# EAGLE board TEF6686_radio_rev2 (EAGLE 7.2.0)
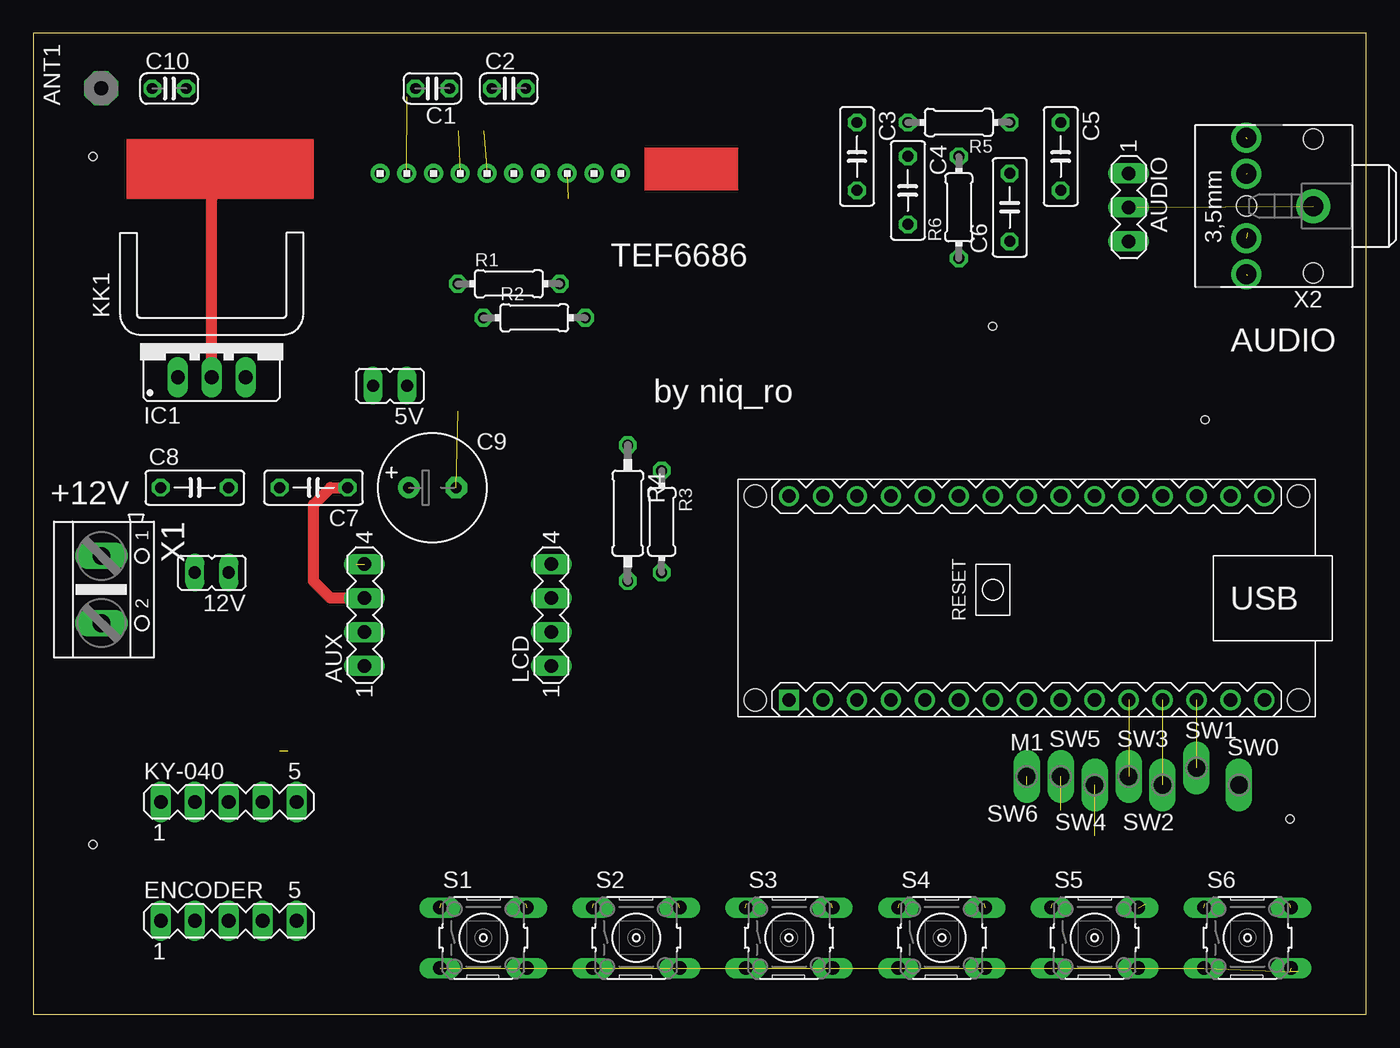
[diagram p0: board, top side]
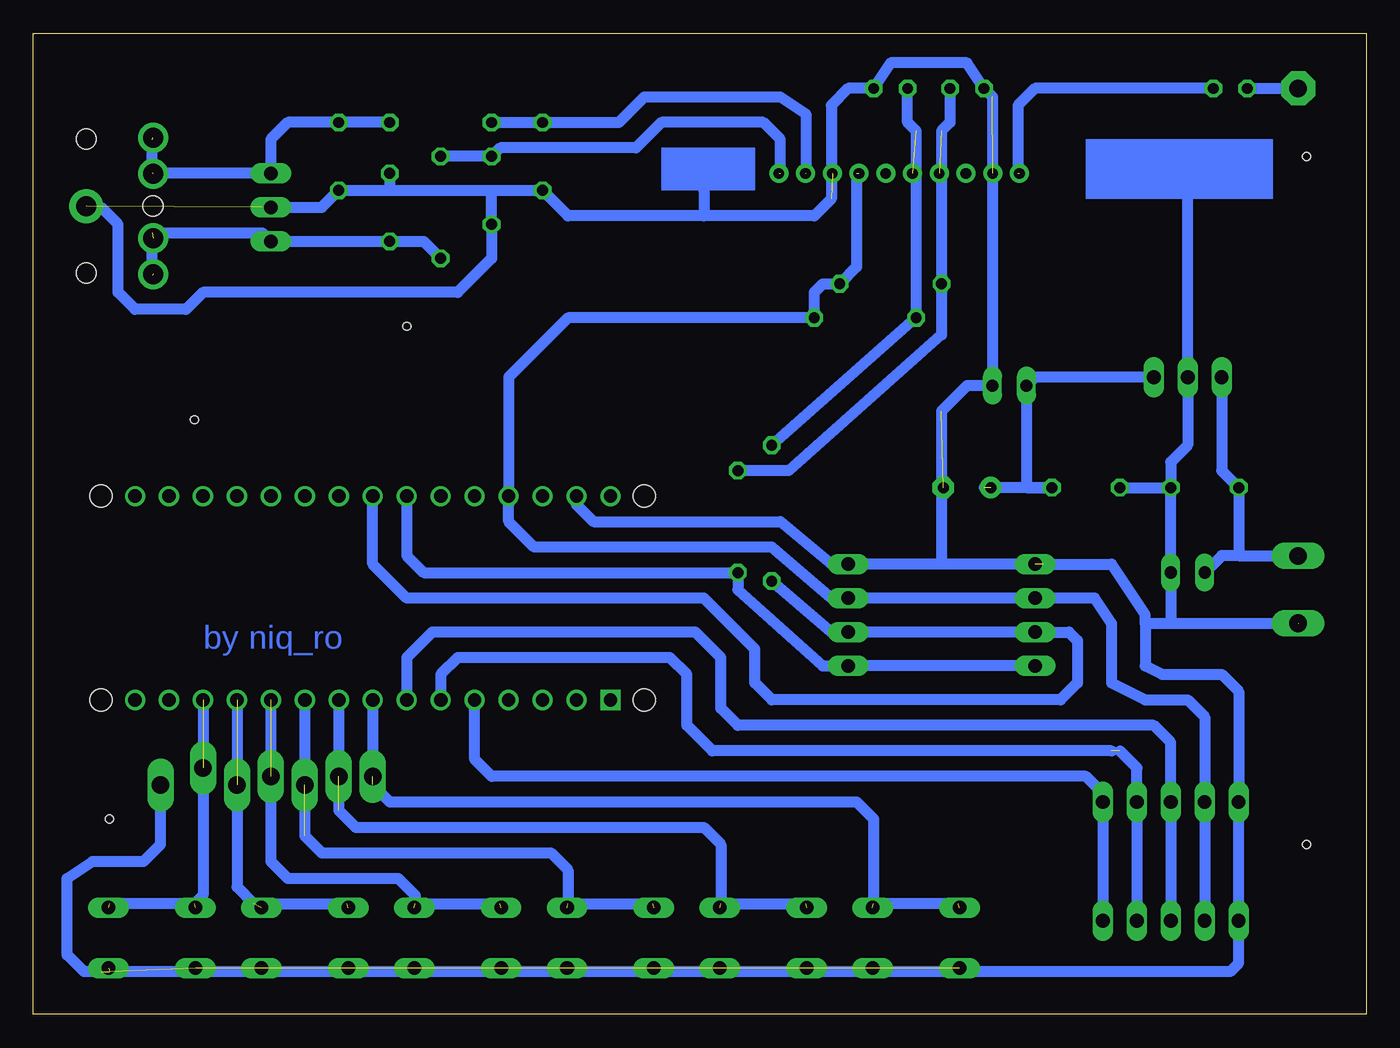
[diagram p1: board, bottom side, seen from below]

Size 99.67 x 73.33 mm. Coordinates in mm from the lower left corner, seen from the top.
Outline: 0,0 99.67,0 99.67,73.33 0,73.33 0,0
Copper layers (1*16): Top 0.035mm / dielectric 1.5mm / Bottom 0.035mm
Design rules "default": minimum track width 10mil, minimum drill 24mil, track to track 8mil, track to pad 8mil, pad to pad 8mil, via to via 8mil, smd to smd 8mil, copper to edge 40mil, drill to drill 8mil, minimum pad ring 10mil, minimum via ring 8mil, stop-mask expansion 4mil, vias tented up to drill 0mil, thermal gap 10mil
Holes 0.6 mm at 4.44,12.7 93.98,14.61 4.44,64.14 87.63,44.45 71.75,51.44

## Footprints (pad centres in the part's own frame; a part is rotated, then mirrored left to right if it is on the bottom)
JP1 = drill 0.914 long: 1 0,-1.27; 2 0,1.27
PAD-01 = drill 1.321 pad 2.54 octagon: 1 0,0
MA03-1 = drill 1.016 long: 1 -2.54,0; 2 0,0; 3 2.54,0
MA04-1 = drill 1.016 long: 1 -3.81,0; 2 -1.27,0; 3 1.27,0; 4 3.81,0
C025-024X044 = drill 0.813 octagon: 1 -1.27,0; 2 1.27,0
C050-025X075 = drill 0.813 octagon: 1 -2.54,0; 2 2.54,0
E3,5-8 = drill 0.813 pad 1.6: + -1.778,0 | drill 0.813 pad 1.6 octagon: - 1.778,0
MA05-1 = drill 1.016 long: 1 -5.08,0; 2 -2.54,0; 3 0,0; 4 2.54,0; 5 5.08,0
78XXS = drill 1.016 long: GND 0,-2.54; IN -2.54,-2.54; OUT 2.54,-2.54
ARDUINO-NANO-3.0 = drill 1 square: J1.1 17.78,7.62 | drill 1: J1.2 15.24,7.62; J1.3 12.7,7.62; J1.4 10.16,7.62; J1.5 7.62,7.62; J1.6 5.08,7.62; J1.7 2.54,7.62; J1.8 0,7.62; J1.9 -2.54,7.62; J1.10 -5.08,7.62; J1.11 -7.62,7.62; J1.12 -10.16,7.62; J1.13 -12.7,7.62; J1.14 -15.24,7.62; J1.15 -17.78,7.62; J2.1 17.78,-7.62; J2.2 15.24,-7.62; J2.3 12.7,-7.62; J2.4 10.16,-7.62; J2.5 7.62,-7.62; J2.6 5.08,-7.62; J2.7 2.54,-7.62; J2.8 0,-7.62; J2.9 -2.54,-7.62; J2.10 -5.08,-7.62; J2.11 -7.62,-7.62; J2.12 -10.16,-7.62; J2.13 -12.7,-7.62; J2.14 -15.24,-7.62; J2.15 -17.78,-7.62 | hole 1.651: -20.32,7.62; -20.32,-7.62; 20.32,-7.62; 20.32,7.62
0204/7 = drill 0.813 octagon: 1 -3.81,0; 2 3.81,0
0207/10 = drill 0.813 octagon: 1 -5.08,0; 2 5.08,0
B3F-10XX = drill 1.016 long: 1 -3.251,2.261; 2 3.251,2.261; 3 -3.251,-2.261; 4 3.251,-2.261
P1-13Y = drill 1.321 pad 1.905 long: TP 0,0
1X10 = drill 0.8 pad 1.422: 1 -9,0; 2 -7,0; 3 -5,0; 4 -3,0; 5 -1,0; 6 1,0; 7 3,0; 8 5,0; 9 7,0; 10 9,0
AK500/2 = drill 1.321 long: 1 -2.515,0; 2 2.515,0
STX3100 = drill 1.5 pad 2.54: 1 2.7,-0.1 | drill 1.5: 2 7.7,5; 3 7.7,2.3; 4 7.7,-2.5; 5 7.7,-5.2 | hole 1.5: 2.7,4.9; 2.7,-5.1; 7.7,-0.1

## Placement (x,y rotation side)
5V  [JP1]  26.67,46.99 90 top
12V  [JP1]  13.34,33.02 90 top
ANT1  [PAD-01]  5.08,69.22 90 top
AUDIO  [MA03-1]  81.91,60.33 270 top
AUX  [MA04-1]  24.77,29.85 90 top
C1  47p  [C025-024X044]  29.84,69.22 180 top
C2  47p  [C025-024X044]  35.56,69.22 0 top
C3  15n  [C050-025X075]  61.59,64.14 270 top
C4  15n  [C050-025X075]  65.41,61.59 270 top
C5  3n9  [C050-025X075]  76.83,64.14 270 top
C6  3n9  [C050-025X075]  73.03,60.33 90 top
C7  100n  [C050-025X075]  20.95,39.37 180 top
C8  330n  [C050-025X075]  12.07,39.37 0 top
C9  100uF  [E3,5-8]  29.84,39.37 0 top
C10  1n  [C025-024X044]  10.16,69.22 0 top
ENCODER  [MA05-1]  14.61,6.99 0 top
IC1  [78XXS]  13.34,50.17 0 top
KK1  D03S  [D03S]  13.34,52.07 0 top
KY-040  [MA05-1]  14.61,15.87 0 top
LCD  [MA04-1]  38.73,29.85 90 top
M1  NANO-3.0  [ARDUINO-NANO-3.0]  74.3,31.11 180 top
R1  4k7  [0204/7]  35.56,54.61 0 top
R2  4k7  [0204/7]  37.46,52.07 0 top
R3  220R  [0204/7]  46.99,36.83 270 top
R4  220R  [0207/10]  44.45,37.47 270 top
R5  3k3  [0204/7]  69.22,66.67 180 top
R6  3k3  [0204/7]  69.22,60.33 90 top
S1  [B3F-10XX]  33.66,5.71 0 top
S2  [B3F-10XX]  45.09,5.71 0 top
S3  [B3F-10XX]  56.52,5.71 0 top
S4  [B3F-10XX]  67.94,5.71 0 top
S5  [B3F-10XX]  79.38,5.71 0 top
S6  [B3F-10XX]  90.8,5.71 0 top
SW0  COM  [P1-13Y]  90.17,17.14 0 top
SW1  PTR1PAD1-13Y  [P1-13Y]  87,18.42 0 top
SW2  PTR1PAD1-13Y  [P1-13Y]  84.45,17.14 180 top
SW3  PTR1PAD1-13Y  [P1-13Y]  81.91,17.78 0 top
SW4  PTR1PAD1-13Y  [P1-13Y]  79.38,17.14 180 top
SW5  PTR1PAD1-13Y  [P1-13Y]  76.83,17.78 0 top
SW6  PTR1PAD1-13Y  [P1-13Y]  74.3,17.78 180 top
TUNER  TEF6686  [1X10]  34.92,62.87 0 top
X1  [AK500/2]  5.08,31.75 270 top
X2  STEREOJACK  [STX3100]  98.42,60.33 180 top

## Library data of the parts
5V 12V = jumper
ANT1 = discrete
AUDIO AUX ENCODER KY-040 LCD = con-lstb; OC_FARNELL: unknown; OC_NEWARK: unknown
C1-C10 R1-R6 = rcl
IC1 = v-reg
KK1 = heatsink
M1 = diy-modules (1)
S1-S6 = switch-omron; MPN: B3F-1000; OC_FARNELL: 176432; OC_NEWARK: 36M3542
SW0 SW1-SW6 = testpad
TUNER = headers(2mm)
X1 = con-ptr500; OC_FARNELL: unknown; OC_NEWARK: unknown
X2 = adafruit

## Nets
3V3: M1.J2.14
+5V: 5V.2 AUX.3 C7.1 C9.+ ENCODER.2 IC1.OUT KY-040.2 LCD.3 M1.J2.4 R1.2 R2.2 TUNER.7
GND: 5V.1 12V.1 AUDIO.2 AUX.4 C1.2 C2.2 C3.2 C4.2 C5.2 C6.2 C7.2 C8.2 C9.- ENCODER.1 IC1.GND KY-040.1 LCD.4 M1.J2.2 S1.3 S1.4 S2.3 S2.4 S3.3 S3.4 S4.3 S4.4 S5.3 S5.4 S6.3 S6.4 SW0.TP TUNER.2 TUNER.8 X1.2 X2.1
GND.1: M1.J1.4
N$1: AUDIO.1 C5.1 R5.1 X2.4 X2.5
N$2: C2.1 R2.1 R4.1 TUNER.5
N$3: ENCODER.4 KY-040.4 M1.J1.6
N$5: 12V.2 C8.1 IC1.IN X1.1
N$6: AUX.2 LCD.2 M1.J2.8 R4.2
N$7: AUX.1 LCD.1 M1.J2.7 R3.2
N$8: ENCODER.5 KY-040.5 M1.J1.5
N$9: ANT1.1 C10.1
N$10: ENCODER.3 KY-040.3 M1.J1.7
N$11: M1.J1.8 S1.1 S1.2 SW6.TP
N$12: M1.J1.9 S2.1 S2.2 SW5.TP
N$13: M1.J1.10 S3.1 S3.2 SW4.TP
N$14: M1.J1.11 S4.1 S4.2 SW3.TP
N$15: M1.J1.12 S5.1 S5.2 SW2.TP
N$16: C4.1 R6.2 TUNER.10
N$19: C3.1 R5.2 TUNER.9
N$20: M1.J1.13 S6.1 S6.2 SW1.TP
N$22: C1.1 R1.1 R3.1 TUNER.4
N$23: C10.2 TUNER.1
N$24: AUDIO.3 C6.1 R6.1 X2.2 X2.3
VIN: M1.J2.1

## Tracks (layer width: path | path; a pad name or v marks a point on that pad's centre or on a via)
+5V  (2 unrouted)
  Top 0.813: AUX.3 22.22,31.11 20.95,32.39 20.95,38.1 22.22,39.37 C7.1
  Bottom 0.813: 38.1,62.87 38.1,55.88 R1.2 40.64,54.61 41.27,53.98 R2.2 59.69,52.07 64.14,47.62 M1.J2.4 | ENCODER.2 KY-040.2 12.07,22.22 13.34,23.5 16.51,23.5 19.05,24.76 19.05,29.21 20.32,31.11 AUX.3 LCD.3 40,31.11 44.45,34.92 62.23,34.92 64.14,36.83 M1.J2.4 | M1.J2.4 64.14,38.1 | IC1.OUT 24.77,47.62 5V.2 25.4,39.37 C7.1 28.57,39.37
GND  (19 unrouted)
  Top 0.813: IC1.GND 13.34,60.96
  Bottom 0.813: 82.55,60.33 AUDIO.2 78.11,60.33 C5.2 73.03,61.59 | 73.03,61.59 65.41,61.59 | 65.41,61.59 C3.2 59.69,59.69 49.53,59.69 | C6.2 73.03,61.59 | C4.2 65.41,61.59 | 49.53,59.69 41.27,59.69 40,60.96 40,67.95 38.73,69.22 C2.2 35.56,71.12 29.84,71.12 C1.2 27.94,68.58 5V.1 | 93.98,3.18 10.16,3.18 9.53,3.81 ENCODER.1 KY-040.1 9.53,24.13 10.79,25.4 15.24,25.4 16.51,26.04 16.51,29.21 | AUX.4 31.75,33.66 | 31.75,33.66 LCD.4 40,33.66 43.81,36.83 57.78,36.83 59.05,38.1 M1.J2.2 | 24.13,33.66 19.05,33.66 16.51,29.85 16.51,29.21 | 5.08,29.21 14.61,29.21 | 14.61,29.21 16.51,29.21 | 14.61,33.66 12V.1 | 12V.1 14.61,29.21 | 12V.1 C8.2 | IC1.GND 13.34,42.55 14.61,41.28 C8.2 | C7.2 C8.2 | 5V.1 27.94,46.36 | 5V.1 29.84,46.99 31.75,45.09 31.75,33.66 | 94.61,3.18 95.89,3.18 97.16,4.45 97.16,10.16 95.25,11.43 91.44,11.43 90.17,12.7 SW0.TP | 49.53,61.59 49.53,59.69
N$1  (2 unrouted)
  Bottom 0.813: R5.1 C5.1 80.64,66.67 81.91,65.41 AUDIO.1 90.8,62.87 90.8,65.41
N$2  (1 unrouted)
  Bottom 0.813: C2.1 34.29,66.67 33.66,66.04 R2.1 R4.1
N$3  (1 unrouted)
  Bottom 0.813: 19.05,19.68 48.89,19.68 50.8,21.59 50.8,25.4 52.07,26.67 67.94,26.67 69.22,25.4 M1.J1.6 | ENCODER.4 KY-040.4 17.14,18.42 18.41,19.68
N$4
  Bottom 0.813: 65.41,58.42 65.41,56.52 67.94,53.98 87,53.98 88.27,52.7 92.08,52.7 93.34,53.98 93.34,59.06 94.61,60.33 95.89,60.33
N$5  (1 unrouted)
  Bottom 0.813: IC1.IN 10.79,40.64 C8.1 9.53,34.29 | 9.53,34.29 5.08,34.29 | 9.53,34.29 10.79,34.29 12V.2
N$6
  Bottom 0.813: R4.2 40,28.57 LCD.2 AUX.2 22.22,28.57 21.59,27.94 21.59,24.76 22.86,23.5 44.45,23.5 45.72,24.76 45.72,27.31 49.53,31.11 71.75,31.11 74.3,33.66 M1.J2.8
N$7
  Bottom 0.813: AUX.1 LCD.1 40.64,26.04 46.99,31.75 R3.2 70.48,33.02 71.75,34.29 M1.J2.7
N$8
  Bottom 0.813: ENCODER.5 KY-040.5 19.68,16.51 20.95,17.78 65.41,17.78 66.67,19.05 M1.J1.5
N$9
  Bottom 0.813: C10.1 ANT1.1
N$10
  Bottom 0.813: ENCODER.3 KY-040.3 14.61,20.32 15.88,21.59 46.99,21.59 48.26,22.86 48.26,26.67 50.16,28.57 69.85,28.57 71.75,26.67 M1.J1.7
N$11  (3 unrouted)
  Bottom 0.813: M1.J1.8 74.3,17.14 73.03,15.87 38.1,15.87 36.83,14.61 36.83,8.25 | 36.83,8.25 36.83,7.62 | 30.48,8.25 36.83,8.25
N$12  (3 unrouted)
  Bottom 0.813: M1.J1.9 76.83,15.24 75.56,13.97 49.53,13.97 48.26,12.7 48.26,8.25 41.91,8.25
N$13  (3 unrouted)
  Bottom 0.813: M1.J1.10 79.38,13.33 78.11,12.07 60.96,12.07 59.69,10.79 59.69,8.25 53.34,8.25
N$14  (3 unrouted)
  Bottom 0.813: M1.J1.11 81.91,11.43 80.64,10.16 72.39,10.16 71.12,8.89 71.12,8.25 64.77,8.25
N$15  (3 unrouted)
  Bottom 0.813: M1.J1.12 84.45,9.53 83.19,8.25 76.2,8.25
N$16  (1 unrouted)
  Bottom 0.813: 43.81,62.87 43.81,65.41 45.09,66.67 52.7,66.67 54.61,64.77 64.77,64.77 C4.1 R6.2
N$17
  Bottom 0.813: 13.34,48.26 13.34,62.23
N$19  (1 unrouted)
  Bottom 0.813: 41.91,62.87 41.91,67.31 43.81,68.58 53.98,68.58 55.88,66.67 C3.1 R5.2
N$20  (3 unrouted)
  Bottom 0.813: M1.J1.13 87,8.89 87.63,8.25 93.98,8.25
N$22  (1 unrouted)
  Bottom 0.813: C1.1 31.12,66.67 31.75,66.04 R1.1 31.75,50.8 43.18,40.64 R3.1
N$23  (1 unrouted)
  Bottom 0.813: C10.2 24.77,69.22 26.04,67.95 26.04,62.87
N$24  (2 unrouted)
  Bottom 0.813: 90.8,55.25 90.8,58.42 82.55,58.42 AUDIO.3 C6.1 70.48,57.78 R6.1
(copper drawn outside any net)
  shapes: Bottom area x2, Top area x2

## Text on the board
Bottom: by niq_ro
tNames: TEF6686 | AUDIO | by niq_ro | +12V